# Altium PCB Amp.PcbDoc
Units mil, origin at the board's own origin, x right, y up, seen from the top; angles counter-clockwise.
Board outline 6000 x 4000 mil, 2 copper layers (Top Layer, Bottom Layer); 24 components, 23 nets, 81 pads, 11 vias.
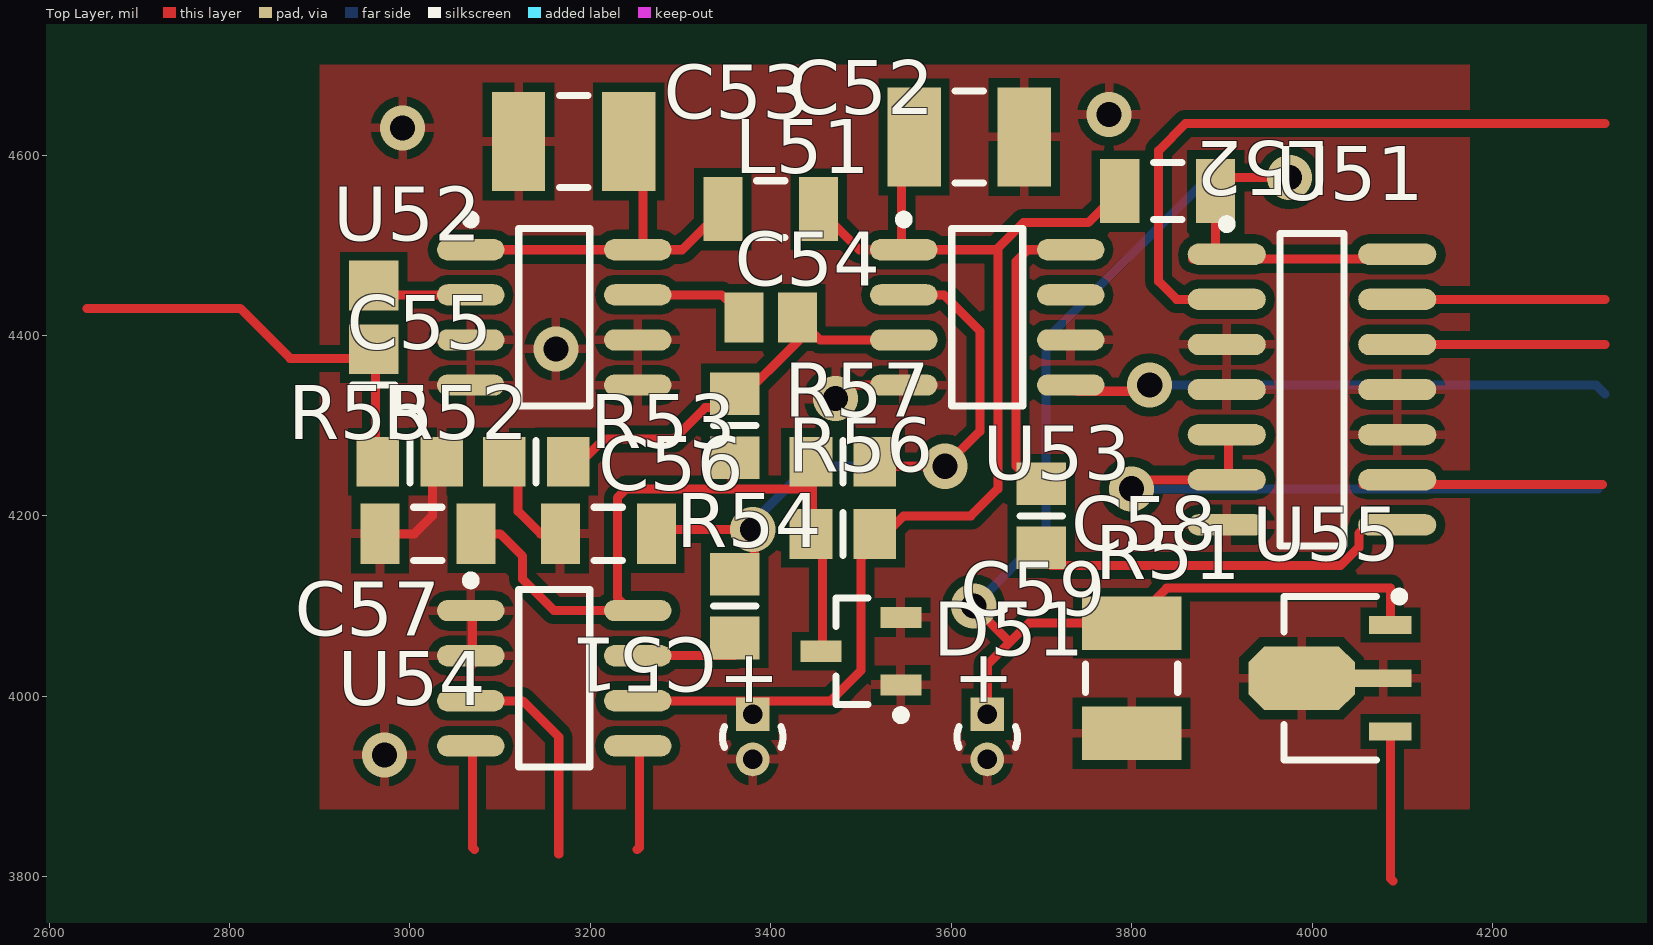
[diagram p0: Top Layer view]
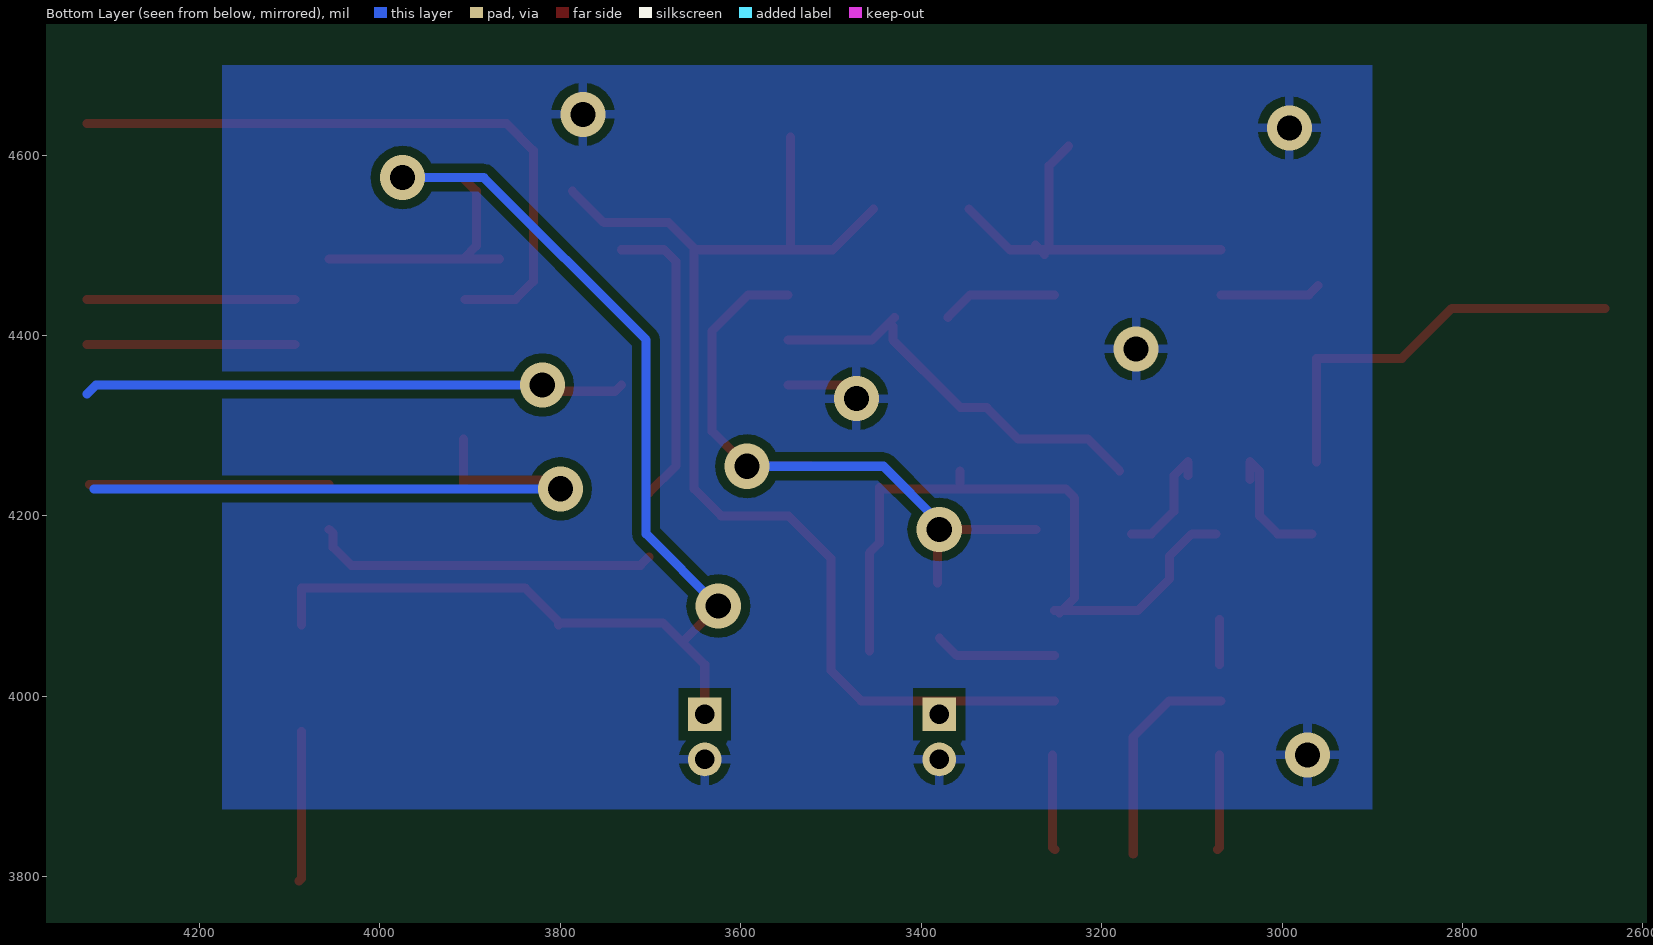
[diagram p1: Bottom Layer view, seen from below]

## Layer stack, top to bottom
Top Layer: signal copper 1.4
Dielectric: dielectric 12.6, FR-4, Dk 4.8
Bottom Layer: signal copper 1.4

## Board outline
1080,1060 7080,1060 7080,5060 1080,5060

## Design rules (kind name [scope] priority, off if disabled: settings)
Clearance [All] p1: gap=10
PolygonConnect [All] p1: connectstyle=Relief reliefconductorwidth=10 reliefentries=4 polygonreliefangle="90 Angle"
RoomDefinition Amp [InComponentClass('Amp')] p1: confinementstyle=ConfineOut formatcopy=TRUE lockcomponents=FALSE outline 7325,390 8765,390 8765,1110 7325,1110
RoutingVias [All] p1: holewidth=28 width=50 viastyle="Through Hole" minholewidth=28 minwidth=50 maxholewidth=28 maxwidth=50
SilkscreenOverComponentPads [All] p1: minsilkscreentomaskgap=10
SolderMaskExpansion [All] p1: expansion=4
Width [All] p1: maxlimit=10 minlimit=10 preferedwidth=10
27 further rules are at their usual default settings.

## Components (designator, comment, footprint, x,y, rotation, side; value= is the part's Value field where it differs from the comment)
C51 "Cap Pol1" PCBComponent_1 3380,3980 r180 top
C52 "Cap" CAPC3225M 3620,4620 r0 top
C53 "Cap" CAPC3225M 3181.5,4615 r0 top
C54 "Cap" CAPC2012L 3400,4420 r0 top
C55 "Cap" CAPC2512L 2960,4420 r90 top
C56 "Cap" CAPC3216L 3220,4180 r0 top
C57 "Cap" CAPC3216L 3020,4180 r180 top
C58 "Cap" CAPC3225M 3800,4020 r90 top
C59 "Cap Pol1" PCBComponent_1 3640,3980 r180 top
D51 "Diode BAT17" SOT95P240-3N 3500,4050 r180 top
L51 "Inductor" INDC3216AL 3400,4540 r0 top
L52 "Inductor" INDC3216AL 3840,4560 r0 top
R51 "Res2" RESC2012N 3700,4200 r90 top
R52 "Res2" RESC2012N 3140,4260 r0 top
R53 "Res2" RESC2012N 3360,4300 r90 top
R54 "Res2" RESC2012N 3360,4100 r90 top
R55 "Res2" RESC2012N 3000,4260 r180 top
R56 "Res2" RESC2012N 3480,4180 r180 top
R57 "Res2" RESC2012N 3480,4260 r0 top
U51 "SN74S197D" D014_N 4000,4340 r0 top
U52 "SA5205A" SOIC127P600-8L 3160,4420 r0 top
U53 "AD8561" SOIC127P600-8L 3640,4420 r0 top
U54 "AD8400" SOIC127P600-8L 3160,4020 r0 top
U55 "µA7805CKTER" SOT89RL 4020,4020 r180 top

## Footprints (in the part's own frame and the unit in brackets; to place one, negate y for a bottom-side part, rotate by r counter-clockwise, add the part's x,y. Pads: shape width x height; smd on the part's side, far side on the other; paste and mask are expansions set on the pad)
CAPC2012L [mm] "Chip Capacitor, Body 2.0x1.3mm, IPC High Density"
  rect 1.1x1.4 smd: 1(-0.75,0) 2(0.75,0)
  body extent -1.1,-0.72 1.1,0.72, height 1.4
CAPC2512L [mm] "Chip Capacitor, Body 2.54x1.27mm, IPC High Density"
  rect 1.4x1.4 smd: 1(-0.9,0) 2(0.9,0)
  silkscreen extent -1.9,-0.6 -1.9,0.6, body extent -1.45,-0.82 1.45,0.82, height 1.3
CAPC3216L [mm] "Chip Capacitor, Body 3.2x1.6mm, IPC High Density"
  rect 1.1x1.7 smd: 1(-1.35,0) 2(1.35,0)
  silkscreen extent -0.4,-0.75 0.4,0.75, body extent -1.7,-0.9 1.7,0.9, height 1.3
CAPC3225M [mm] "Chip Capacitor, Body 3.2x2.5mm, IPC Low Density"
  rect 1.5x2.8 smd: 1(-1.55,0) 2(1.55,0)
  silkscreen extent -0.4,-1.3 0.4,1.3, body extent -1.7,-1.35 1.7,1.35, height 1.5
D014_N [mm] "SOIC, 14-Leads, Body 8.7x3.9mm, Pitch 1.27mm, IPC Medium Density"
  oval 2.2x0.6 smd: 1(-2.4,3.81) 2(-2.4,2.54) 3(-2.4,1.27) 4(-2.4,0) 5(-2.4,-1.27) 6(-2.4,-2.54) 7(-2.4,-3.81) 8(2.4,-3.81) 9(2.4,-2.54) 10(2.4,-1.27) 11(2.4,0) 12(2.4,1.27) 13(2.4,2.54) 14(2.4,3.81)
  silkscreen extent -2.52,-4.4 0.9,4.78, body extent -2,-4.38 2,4.38, height 1.75
INDC3216AL [mm] "Chip Inductor, Body 3.2x1.6mm, IPC High Density"
  rect 1.1x1.8 smd: 1(-1.35,0) 2(1.35,0)
  silkscreen extent -0.4,-0.8 0.4,0.8, body extent -1.7,-0.9 1.7,0.9, height 0.55
PCBComponent_1 [mm]
  rect 0.95x0.95 hole 0.55: 1(0,0)
  round 0.95 hole 0.55: 2(0,1.27)
  silkscreen extent -0.85,0.34 0.85,0.93, body extent -1.01,-0.38 1.02,1.65, height 4.06
RESC2012N [mm] "Chip Resistor, Body 2.0x1.2mm, IPC Medium Density"
  rect 1.2x1.4 smd: 1(-0.9,0) 2(0.9,0)
  silkscreen extent 0,-0.6 0,0.6, body extent -1.07,-0.7 1.07,0.7, height 0.7
SOIC127P600-8L [mm] "SOIC, 8-Leads, Body 4.9x3.9mm, Pitch 1.27mm, IPC High Density"
  oval 1.9x0.6 smd: 1(-2.35,1.905) 2(-2.35,0.635) 3(-2.35,-0.635) 4(-2.35,-1.905) 5(2.35,-1.905) 6(2.35,-0.635) 7(2.35,0.635) 8(2.35,1.905)
  silkscreen extent -2.47,-2.5 1,2.88, body extent -2,-2.5 2,2.5, height 1.75
SOT89RL [mm] "SOT89, 3-Leads, Body 4.5x2.5 mm, Pitch 1.5mm, Lead Span 4mm - Reverse Pinning, IPC High Density"
  rect 1.2x0.5 smd: 1(-1.7,1.5) 3(-1.7,-1.5)
  rect 1.6x0.5 smd: 2(-1.5,0)
  oct 3x1.8 smd: 2(0.8,0)
  silkscreen extent -2.08,-2.42 1.3,2.3, body extent -1.3,-2.3 1.3,2.3, height 1.6
SOT95P240-3N [mm] "SOT23, 3-Leads, Body 2.9x1.3mm, Pitch 0.95mm, Lead Span 2.4mm, IPC Medium Density"
  rect 1.15x0.6 smd: 1(-1.125,0.95) 2(-1.125,-0.95) 3(1.125,0)
  silkscreen extent -1.25,-1.5 0.7,1.92, body extent -0.7,-1.5 0.7,1.5, height 1.14

## Part data
C51 C59: "Polarized Capacitor (Radial)"
C52 C53 C54 C55 C56 C57 C58: "Capacitor"
D51: "Silicon RF Schottky Diode for Mixer Applications in the VHF/UHF Range"
R51 R52 R53 R54 R55 R56 R57: "Resistor"
U51: "100-MHz Presettable Decade or Binary Counter / Latch"
U52: "Wide-band high-frequency amplifier"
U53: "Ultrafast 7 ns  Single Supply Comparator"
U54: "Digital Potentiometers"
U55: "Positive-Voltage Regulator"

## Via types
v1: diameter 50, hole 28, Top Layer to Bottom Layer, 11 vias

## Nets (pads, with @x,y where several pads share a name; then routed paths per layer and width w, separated by ;. In a path a pad name is that pad's centre, name@x,y a point inside that pad or via, vN(x,y) a via of type N, cw(c..) or ccw(c..) an arc to the next point about the centre after c; other vN are vias at no path point)
+5: U55.1 | length 167.2
  Top Layer w10: U55.1 4086.93,3798.07 4090,3795
COUNTERRESET: U51.13 | length 230.5
  Top Layer w10: U51.13 4325,4440
D0: U51.5 U51.6 | length 676.5
  Top Layer w10: v1(3800,4230) 3810,4240 U51.6 ; U51.6@3907.36,4235 U51.5@3907.36,4285
  Bottom Layer w10: v1(3800,4230) 4316.85,4230
D1: U51.9 | length 265.5
  Top Layer w10: U51.9@4056.34,4235 4321.85,4235
D2: U51.2 | length 736.2
  Top Layer w10: U51.2 3850,4440 3830,4460 3830,4605 3860,4635 4325,4635
D3: U51.12 | length 230.5
  Top Layer w10: U51.12 4325,4390
ENABLECOUNT: U53.5 | length 610.6
  Top Layer w10: U53.5 3739.37,4338.15 3813.15,4338.15 v1(3820,4345)
  Bottom Layer w10: v1(3820,4345) 3830,4335 3840,4345 4315,4345 4325,4335
GND: C51.2 C52.2 C53.1 C56.1 C57.2 C58.1 C59.2 D51.1 D51.2 R52.1 R55.1 U51.3 U51.4 U51.7 U51.10 U51.11 U52.3 U52.4 U52.5 U52.6 U53.4 U53.6 U54.1 U54.2 U55.2 | length 432.6
  Top Layer w10: C57.2 3005,4180 3025,4200 3025,4249.57 R55.1 ; R55.1@3035.43,4240.43 R55.1 ; R55.1@3035.43,4243.23 R55.1 ; U54.2@3069.33,4035 U54.1@3069.33,4085 ; R52.1@3104.57,4244.91 R52.1 3120,4244.57 3120,4205 3145,4180 C56.1 ; v1(3471.85,4330) 3486.85,4345 U53.4
  other v1: 2971.85,3935 3161.85,4385 2991.85,4630 3775,4645
INPUT: C55.1 R55.2 | length 457.5
  Top Layer w10: 2641.85,4430 2811.85,4430 2867.28,4374.57 2961.85,4374.57 R55.2@2961.85,4260
NetC51_1: C51.1 C52.1 L51.2 L52.1 R56.1 U53.1 U54.6 | length 1355.5
  Top Layer w10: U54.6 C51.1@3380,3995 ; C51.1 C51.1@3380,3995 ; L51.2 3498.15,4495 U53.1 ; C52.1@3545.2,4620 3545.2,4497.28 U53.1 ; L52.1 3751.85,4525 3680,4525 3650,4495 ; C51.1@3380,3995 3466.63,3995 3500,4028.37 3500,4152.72 3517.28,4170 3547.28,4200 3621.85,4200 3651.85,4230 3651.85,4493.15 3650,4495 ; U53.1 3650,4495
NetC53_2: C53.2 L51.1 U52.1 U52.8 | length 436.1
  Top Layer w10: U52.1 U52.8 U52.8@3258.31,4495 ; C53.2@3236.65,4610 3258.31,4588.35 U52.8@3258.31,4495 ; U52.8@3263.31,4490 U52.8@3273.31,4500 ; L51.1 3301.85,4495 U52.8@3258.31,4495
NetC54_1: C54.1 U52.7 | length 128.3
  Top Layer w10: U52.7 3345.47,4445 C54.1
NetC54_2: C54.2 R52.2 R53.2 U53.3 | length 454.8
  Top Layer w10: R52.2@3180,4250 3215,4285 3258.02,4285 3292.28,4285 3327.28,4320 3356.42,4320 3361.85,4325.43 3431.38,4394.96 C54.2@3431.38,4410 ; C54.2 3454.53,4395 U53.3
NetC55_2: C55.2 U52.2 | length 111.8
  Top Layer w10: C55.2 2970.43,4445 U52.2
NetC56_2: C56.2 R54.2 R57.2 U53.2 | length 746.3
  Top Layer w10: C56.2@3272.86,4185 3371.85,4185 3374.36,4181.24 3381.85,4170 R54.2@3381.85,4125.43 ; R57.2@3522.28,4255 v1(3593.15,4255) 3631.85,4293.7 3631.85,4405 3591.85,4445 U53.2
  Bottom Layer w10: v1(3380,4185) 3380,4193.15 3441.85,4255 v1(3593.15,4255)
NetC57_1: C57.1 D51.3 R53.1 R56.2 R57.1 U54.8 | length 810.9
  Top Layer w10: C57.1 3100,4180 3125,4155 3125,4130 3160,4095 U54.8@3244.37,4095 ; U54.8@3246.85,4092.52 U54.8@3244.37,4095 ; U54.8 U54.8@3244.37,4095 ; R53.1@3357.28,4250 3357.28,4230 ; 3377.28,4230 3357.28,4230 ; D51.3@3457.56,4050 3457.56,4158.86 3446.42,4170 3446.42,4231.42 3445,4230 3357.28,4230 ; U54.8@3244.37,4095 3230,4109.37 3230,4220 3240,4230 3357.28,4230
NetR51_1: R51.1 U51.8 | length 384.1
  Top Layer w10: R51.1@3701.85,4154.57 3711.42,4145 4031.85,4145 4051.85,4165 4051.85,4180.51 U51.8@4056.34,4185
NetR51_2: R51.2 U53.8 | length 335
  Top Layer w10: R51.2@3701.85,4225.43 3671.85,4255.43 3671.85,4481.85 3685,4495 U53.8
NetR54_1: R54.1 U54.7 | length 135.6
  Top Layer w10: U54.7 3360.43,4045 R54.1@3380,4064.57
SPI_CLK: U54.5 | length 106
  Top Layer w10: 3251.85,3830 3254.37,3832.52 U54.5@3254.37,3935
SPI_CS: U54.3 | length 244.1
  Top Layer w10: U54.3 3125,3995 3165,3955 3165,3825
SPI_SD: U54.4 | length 106
  Top Layer w10: U54.4@3069.33,3935 3069.33,3832.52 3071.85,3830
VCC: C58.2 C59.1 L52.2 U51.1 U51.14 U55.3 | length 1665.7
  Top Layer w10: v1(3625,4100) 3663.34,4061.66 ; C59.1 3640,4035 3686.02,4081.02 C58.2 ; C58.2@3801.97,4079.06 C58.2 ; U51.1@3867.36,4485 U51.1@3907.36,4485 ; v1(3975,4575) 3908.15,4575 L52.2 3893.15,4499.21 U51.1@3907.36,4485 ; U51.14@4056.34,4485 U51.1@3907.36,4485 ; U55.3 4086.93,4120 3838.98,4120 C58.2
  Bottom Layer w10: v1(3625,4100) 3705,4180 3705,4395 3885,4575 v1(3975,4575)
pads on no net: U53.7

## Polygon pours and split planes (outlines as drawn)
GND on Bottom Layer "Top Layer-No Net" (solid, remove dead copper, pour order 1000): 2900,4699.64 4175,4699.64 4175,3875 2900,3875
GND on Top Layer "Top Layer-No Net" (solid, remove dead copper, pour order 1001): 2900,4700 2900,3875 4174.17,3875 4175,3875.81 4175,4700

## Text inside footprints (layer, text, board x,y; h text height)
C51: Top Overlay "+" at 3350.47,4052.83 h59.06 r270
C59: Top Overlay "+" at 3610.47,4052.83 h59.06 r270